# Altium PCB main.PcbDoc
Units mm, origin at the board's own origin, x right, y up, seen from the top; angles counter-clockwise.
Board outline 237.8 x 254 mm, 2 copper layers (Top Layer, Bottom Layer); 24 components, 126 nets, 68 pads, 12 vias.
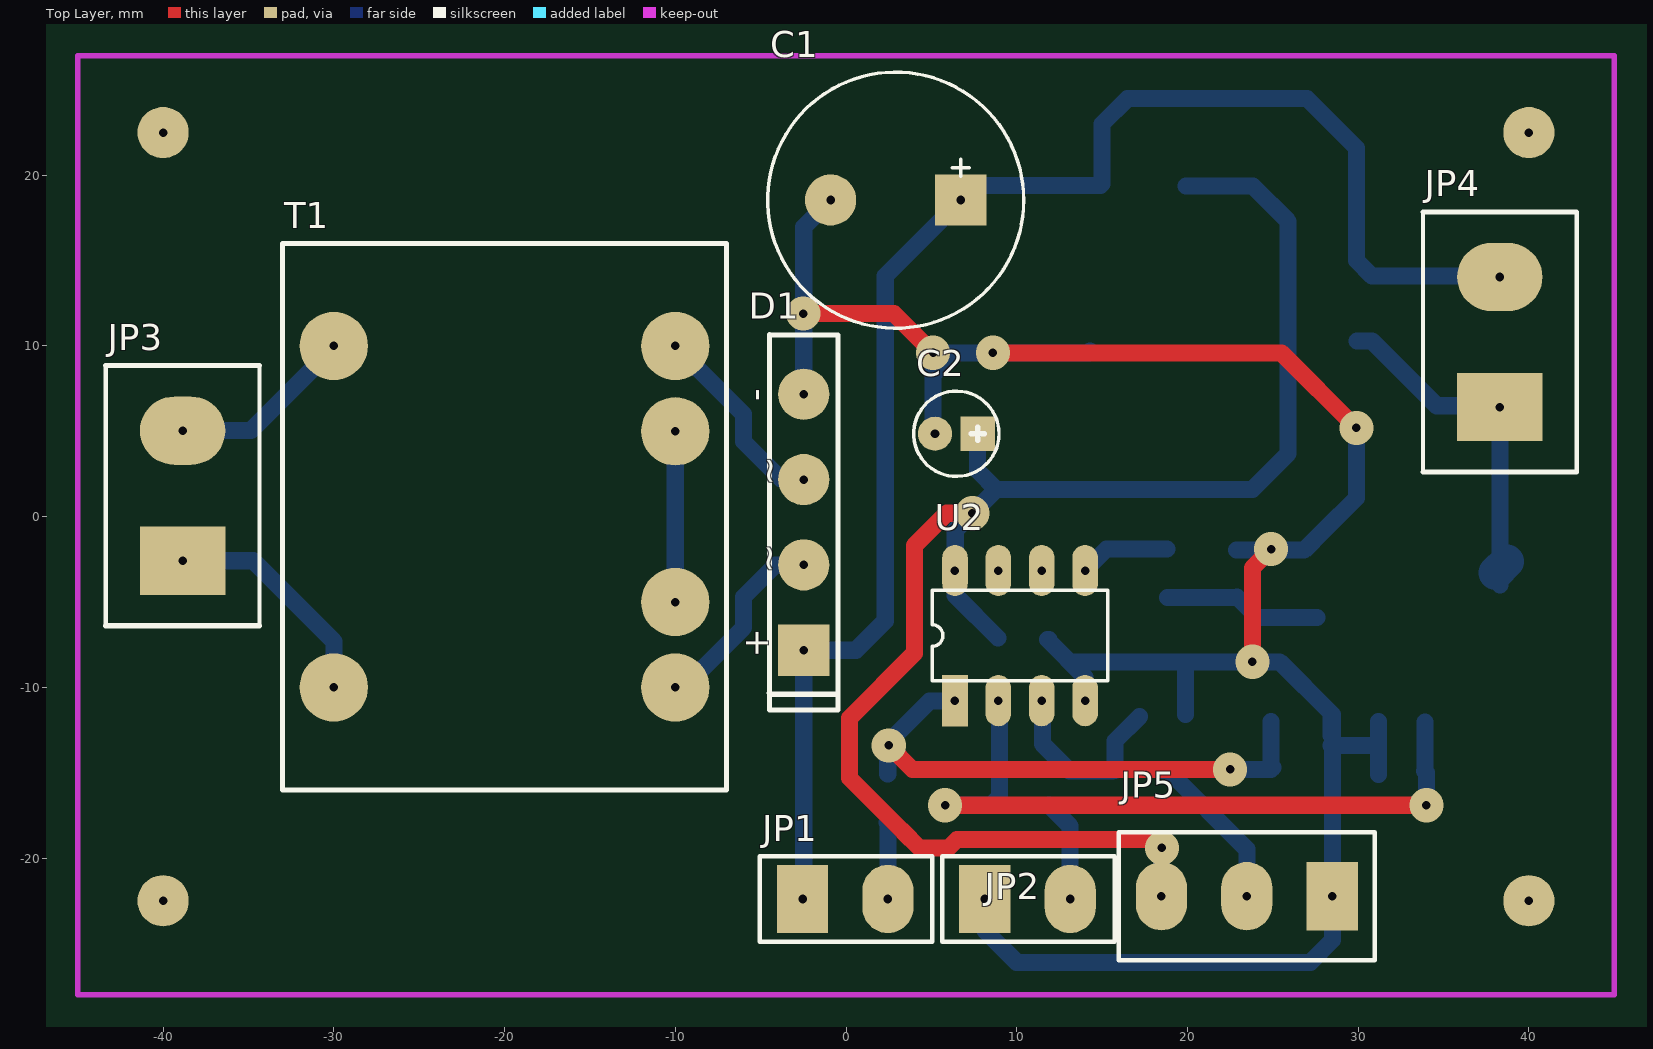
[diagram p0: Top Layer view]
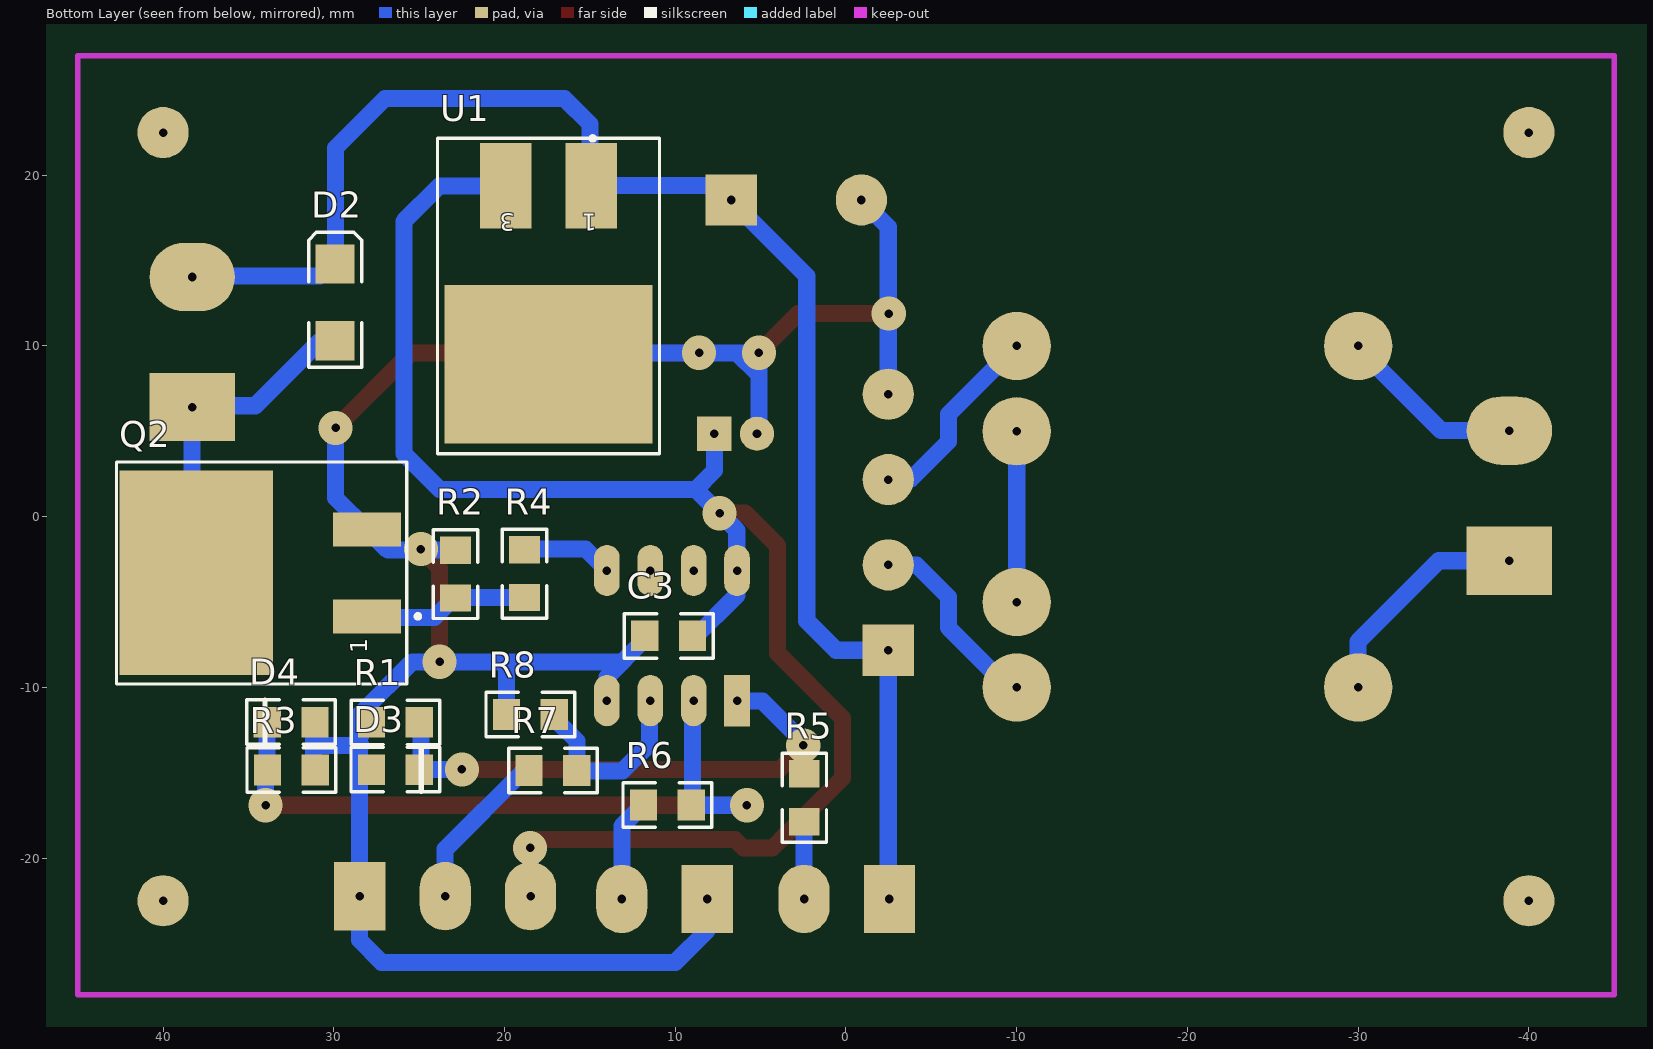
[diagram p1: Bottom Layer view, seen from below]

## Layer stack, top to bottom
Top Layer: signal copper 0.0356
Dielectric: dielectric 0.32, FR-4, Dk 4.8
Bottom Layer: signal copper 0.0356

## Board outline
-69.3,-61.2 167.4,-61.2 167.4,192.8 -70.4,192.8 -70.4,-61 -68,-61

## Design rules (kind name [scope] priority, off if disabled: settings)
Clearance KeepOut [OnLayer('Keep-Out Layer')] p1: gap=1
Clearance Clearance_3 [InPoly] p2: gap=1
Clearance [All] p3: gap=0.5
ComponentClearance [All] p1: gap=0.254 collisioncheckmode=0
HoleSize [All] p1: absolutevalues=TRUE maxlimit=5 minlimit=0.4 maxpercent=80.000 minpercent=20.000
PolygonConnect PolygonConnect_GND [InNet('GND')] p1: connectstyle=Direct reliefconductorwidth=0.4 reliefentries=4 polygonreliefangle="90 Angle"
PolygonConnect [All] p2: connectstyle=Direct reliefconductorwidth=0.254 reliefentries=4 polygonreliefangle="90 Angle"
RoutingLayers [All] p1: top layer=Horizontal bottom layer=Vertical
RoutingVias [All] p1: holewidth=0.8 width=1.4 viastyle="Through Hole" minholewidth=0.7 minwidth=1.3 maxholewidth=1 maxwidth=1.6
SolderMaskExpansion [All] p1: expansion=0.102
TestPointUsage [All] p1: valid=0 allowmultiple=FALSE
Testpoint [All] p1: side=15 testpointundercomponent=TRUE minsize=1.016 maxsize=2.54 preferedsize=1.524 minholesize=0 maxholesize=1.016 preferedholesize=0.813 testpointgrid=0.025 style=1023 order=1234567890
Width [All] p1: maxlimit=5 minlimit=0.1 preferedwidth=0.254 toplayer_prefwidth=1 bottomlayer_prefwidth=1 minimp=50.000000 maximp=50.000000 favimp=50.000000
15 further rules are at their usual default settings.

## Components (designator, comment, footprint, x,y, rotation, side; value= is the part's Value field where it differs from the comment)
C1 "" el8_L -0.9,18.55 r0 top
C2 "100x16" el3_L 7.725,4.85 r180 top
C3 "Cap Semi" _1206 10.375,-6.975 r180 bottom
D1 "Bridge2" KBU8M_L -2.475,-0.325 r90 top
D2 "10BQ100" DSO-C2/X2.3 29.925,12.55 r90 bottom
D3 "C5V6" _1206d 26.4,-14.825 r0 bottom (schematic designator D?)
D4 "C5V6" _1206d 32.5,-12.025 r180 bottom (schematic designator D?)
JP1 "BT5-2" BT5-2_L -2.55,-22.4 r0 top
JP2 "BT5-2" BT5-2_L 8.125,-22.4 r0 top (schematic designator JP?)
JP3 "BT8-2" BT8-2_L -38.85,-2.575 r90 top
JP4 "BT8-2" BT8-2_L 38.3,6.425 r90 top
JP5 "Header 3" BT5-3_L 28.475,-22.225 r180 top
Q2 "IRFR120" SIP-G3 33.05,-3.275 r90 bottom
R1 "20K" _1206 26.4,-12.05 r0 bottom (schematic designator R?)
R2 "20K" _1206 22.875,-3.35 r90 bottom
R3 "20K" _1206 32.475,-14.825 r180 bottom (schematic designator R?)
R4 "1K" _1206 18.825,-3.35 r270 bottom
R5 "1K" _1206 2.45,-16.45 r90 bottom (schematic designator R?)
R6 "1K" _1206 10.45,-16.875 r180 bottom (schematic designator R?)
R7 "1K0" _1206 17.175,-14.875 r0 bottom (schematic designator R?)
R8 "1K0" _1206 18.475,-11.575 r180 bottom
T1 "BV EI 422 1221" "BV EI 304 2840_L" -20,0 r270 top
U1 "MC7805ACD2T" D2PAKTO220_L 17.425,16.675 r0 bottom
U2 "ATTINY13" DIP-8 10.2,-6.975 r0 top

## Footprints (in the part's own frame and the unit in brackets; to place one, negate y for a bottom-side part, rotate by r counter-clockwise, add the part's x,y. Pads: shape width x height; smd on the part's side, far side on the other; paste and mask are expansions set on the pad)
_1206 [mm]
  rect 1.6x1.8 smd: 1(-1.412,-0.007) 2(1.388,-0.007)
  silkscreen extent -2.61,-1.31 2.59,1.29
_1206d [mm]
  rect 1.6x1.8 smd: 1(1.395,-0.009) 2(-1.405,-0.009)
  silkscreen extent -2.6,-1.31 2.6,1.29
BT5-2_L [mm]
  rect 3x4 hole 0.5: 1(0.006,0.008)
  oval 3x4 hole 0.5: 2(5.006,0.008)
  silkscreen extent -2.49,-2.49 7.61,2.51
BT5-3_L [mm]
  round 2 on Top Overlay: 0(-0.001,-4.001)
  rect 3x4 hole 0.5: 1(-0.001,-0.001)
  oval 3x4 hole 0.5: 2(4.999,-0.001) 3(9.999,-0.001)
  silkscreen extent -2.5,-3.75 12.5,3.75
BT8-2_L [mm]
  rect 4x5 hole 0.5: 1(-0.006,0.006)
  oval 4x5 hole 0.5: 2(7.614,0.006)
  silkscreen extent -3.82,-4.49 11.42,4.51
"BV EI 304 2840_L" [mm]
  round 4 hole 0.5: 1(-10,-10) 5(10,-10) 6(10,10) 7(5,10) 9(-5,10) 10(-10,10)
  silkscreen extent -16,-13 16,13
D2PAKTO220_L [mm]
  rect 3x5 smd: 1(-2.5,-2.7) 3(2.5,-2.7)
  rect 12.2x9.3 smd: 4(0,7.75)
  silkscreen extent -6.5,-5.6 6.5,13
DIP-8 [mm]
  rect 1.5x3 hole 0.5: 1(-3.817,-3.8)
  oval 1.5x3 hole 0.5: 2(-1.277,-3.8) 3(1.263,-3.8) 4(3.803,-3.8) 5(3.803,3.82) 6(1.263,3.82) 7(-1.277,3.82) 8(-3.817,3.82)
  silkscreen extent -5.16,-2.64 5.14,2.66
DSO-C2/X2.3 [mm]
  rect 2.3x2.3 smd: 1(-2.25,0) 2(2.25,0)
  silkscreen extent -3.8,-1.55 4.1,1.55
el3_L [mm]
  rect 2x2 hole 0.5: 1(0.011,-0.008)
  round 2 hole 0.5: 2(2.511,-0.008)
  silkscreen extent -1.24,-2.51 3.76,2.49
el8_L [mm]
  rect 3x3 hole 0.5: 1(7.62,0)
  round 3 hole 0.5: 2(0,0)
  silkscreen extent -3.69,-7.51 11.31,7.49
KBU8M_L [mm]
  rect 3x3 hole 0.5: 1(-7.5,0)
  round 3 hole 0.5: 2(-2.5,0) 3(7.5,0) 4(2.5,0)
  silkscreen extent -11,-2 11,2.02
SIP-G3 [mm]
  rect 2x4 smd: 1(-2.563,-4.996) 3(2.517,-4.996)
  rect 12x9 smd: 4(-0.011,5.004)
  silkscreen extent -6.52,-8.1 6.48,9.68

## Part data
C1: library part "Cap Pol1", "Polarized Capacitor (Radial)"
C2: library part "Cap Pol", "Polarized Capacitor (Radial)"
C3: "Capacitor (Semiconductor SIM Model)"
D1: "Diode Bridge"
D2: library part 10BQ015, "Schottky Rectifier"
D3 D4: library part Diode, "Default Diode"
JP1 JP2 JP5: "Header, 3-Pin"
JP3 JP4: library part BT5-2, "Header, 3-Pin"
Q2: "HEXFET N-Channel Power MOSFET"
R1 R2 R3 R4 R5 R6 R7 R8: library part Res2, "Resistor"
U1: "Three-Terminal Positive Voltage Regulator"

## Free pads (board coordinates)
  round 3 hole 0.5: 4(-40,22.5) 5(-40,-22.5) 6(40,-22.5) 7(40,22.5)

## Via types
v1: diameter 2, hole 0.5, Top Layer to Bottom Layer, 12 vias

## Nets (pads, with @x,y where several pads share a name; then routed paths per layer and width w, separated by ;. In a path a pad name is that pad's centre, name@x,y a point inside that pad or via, vN(x,y) a via of type N, cw(c..) or ccw(c..) an arc to the next point about the centre after c; other vN are vias at no path point)
+5V: C2.1 C3.2 JP5.3 U1.3 U2.8 | length 98
  Top Layer w1: 3.327,-18.427 4.3,-19.4 ; v1(7.4,0.2) 5.9,0.2 4,-1.7 4,-8 0.2,-11.8 0.2,-15.3 4.3,-19.4 ; v1(18.5,-19.4) 18,-18.9 6.5,-18.9 6,-19.4 4.3,-19.4
  Bottom Layer w1: C2.1@7.7,4.9 7.7,2.7 8.8,1.6 ; C3.2@8.9,-7.1 6.4,-4.6 6.4,-3.3 6.4,-3.2 6.4,-0.8 8.8,1.6 ; JP5.3 18.476,-19.424 v1(18.5,-19.4) ; U1.3 23.825,19.375 25.9,17.3 25.9,12.4 25.9,3.7 ; 25.1,2.9 25.098,2.898 25.9,3.7 ; 8.8,1.6 23.8,1.6 25.9,3.7
+12V: 
+18V: 
+24V: C1.1 D1.1 D2.2 JP1.1 JP4.2 U1.1 | length 92.1
  Bottom Layer w1: JP1.1@-2.6,-22.5 -2.475,-22.375 D1.1 0.575,-7.825 2.3,-6.1 ; 1.582,-6.818 2.3,-6.1 ; JP4.2@38.4,14.1 30.8,14.1 29.9,15 29.9,19.7 29.9,21.6 27,24.5 16.5,24.5 15,23 15,19.5 14.9,19.4 7.6,19.4 2.3,14.1 2.3,-6.1
+60V: 
+IAKB: 
-60V: 
-IAKB: 
AREF: 
AVCC: 
B6: 
B7: 
C1: 
C2: 
C3: 
C4: 
C5: 
C6: 
C7: 
D0: 
D1: 
D2: 
D3: 
D4: 
D5: 
GND: C1.2 C2.2 C3.1 D1.3 D3.1 D4.1 JP2.1 JP5.1 Q2.3 R1.2 R2.2 R3.2 R8.1 U1.4 U2.4 | length 152.2
  Top Layer w1: v1(-2.5,11.9) 2.8,11.9 v1(5.1,9.6) ; v1(8.6,9.6) 25.5,9.6 v1(29.9,5.2) ; v1(23.8,-8.5) 23.8,-3 v1(24.9,-1.9)
  Bottom Layer w1: D1.3 -2.475,16.975 C1.2 ; v1@5,9.5 5.1,9.5 5.2,9.6 v1(8.6,9.6) ; C2.2@5.1,4.9 5.1,8.3 6.4,9.6 v1(8.6,9.6) ; 5.1,7.1 v1(5.1,9.6) ; JP2.1 8.131,-24.231 10,-26.1 27.2,-26.1 28.5,-24.8 28.5,-22.2 28.5,-11.6 R1.2@28.4,-11.5 ; C3.1@11.9,-7.2 11.8,-7.2 14.003,-9.403 U2.4 ; 13.2,-8.5 25.4,-8.5 R1.2@28.4,-11.5 ; U1.4@14.3,9.7 14.2,9.6 v1(8.6,9.6) ; R8.1 19.887,-8.513 19.9,-8.5 ; R2.2 26.838,-1.962 28,-0.8 29.9,1.1 v1(29.9,5.2) ; v1@24.8,-1.9 v1(24.9,-1.9) ; 28.4,-13.4 31,-13.4 31.1,-13.5 31.2,-13.4 31.2,-12 R3.2@31.2,-15.1 ; R1.2@28.4,-12.8 R1.2@28.4,-11.5
I1: 
I2: 
I3: 
I4: 
I5: 
MISO: 
MOSI: 
NetC5_1: 
NetC5_2: 
NetC6_1: 
NetC8_2: 
NetC9_2: 
NetC10_1: 
NetC12_1: 
NetC16_1: 
NetC16_2: 
NetCR1_2: 
NetCR1_3: 
NetD1_1: 
NetD1_2: D1.2 T1.6 | length 11.6
  Bottom Layer w1: T1.6 -9.5,-10 -6,-6.5 -6,-4.7 -4.125,-2.825 D1.2
NetD1_3: 
NetD1_4: D1.4 T1.10 | length 11.6
  Bottom Layer w1: T1.10 -6,6 -6,4.4 -3.8,2.2 D1.4@-2.6,2.2
NetD2_1: 
NetD2_1: D2.1 JP4.1 Q2.4 | length 21.4
  Bottom Layer w1: D2.1 30.8,10.3 34.6,6.5 38.3,6.5 Q2.4@38.3,-4
  Bottom Layer w2: Q2.4 Q2.4@38.719,-2.621
NetD2_2: 
NetD3_1: 
NetD3_2: D3.2 R1.1 R5.2 U2.1 | length 32.9
  Top Layer w1: v1(2.5,-13.4) 3.9,-14.8 v1(22.5,-14.8)
  Bottom Layer w1: v1@2.4,-13.4 2.6,-13.4 v1(2.5,-13.4) ; R5.2 2.443,-13.257 4.9,-10.8 U2.1@6.4,-10.8 ; v1(22.5,-14.8) 24.9,-14.8 25,-14.7 24.9,-14.6 R1.1@24.9,-12
NetD4_1: 
NetD4_2: D4.2 R3.1 R6.2 U2.2 | length 42.3
  Top Layer w1: v1(5.8,-16.9) v1(34,-16.9)
  Bottom Layer w1: v1(5.8,-16.9) 8.5,-16.9 9,-16.4 U2.2@9,-10.6 ; D4.2 33.905,-14.895 33.9,-14.9 34,-15 v1(34,-16.9)
NetD5_1: 
NetD6_2: 
NetD7_1: 
NetD7_2: 
NetD8_2: 
NetD?_2: 
NetD?_2: 
NetDS1_1: 
NetDS2_1: 
NetFU1_1: 
NetFU1_2: 
NetJP1_1: 
NetJP1_1: 
NetJP1_2: JP1.2 R5.1 | length 4.5
  Bottom Layer w1: R5.1@2.4,-17.9 2.456,-17.956 JP1.2
NetJP2_2: JP2.2 R6.1 | length 6
  Bottom Layer w1: R6.1@11.9,-16.9 13.131,-18.131 JP2.2
NetJP3_1: JP3.1 T1.5 | length 13.7
  Bottom Layer w1: JP3.1 -34.719,-2.581 -30,-7.3 -30,-10.1 T1.5@-29.9,-10.1
NetJP3_2: JP3.2 T1.1 | length 10.9
  Bottom Layer w1: JP3.2 -34.861,5.039 T1.1@-30,9.9
NetJP4_1: 
NetJP5_2: JP5.2 R7.2 | length 9.6
  Bottom Layer w1: R7.2 18.868,-14.868 23.476,-19.476 JP5.2
NetJP6_1: 
NetJP7_1: 
NetJP8_1: 
NetJP9_1: 
NetJP10_1: 
NetJP11_1: 
NetJP12_1: 
NetJP?_2: 
NetL2_1: 
NetQ1_3: 
NetQ2_1: 
NetQ2_1: Q2.1 R2.1 R4.2 | length 9.3
  Bottom Layer w1: R4.2 22.862,-4.738 22.9,-4.7 24.1,-5.9 Q2.1@27.6,-5.9
NetQ3_1: 
NetQ4_1: 
NetQ5_1: 
NetQ6_1: 
NetQ7_1: 
NetQ8_1: 
NetQ9_1: 
NetQ10_1: 
NetR1_2: 
NetR3_2: 
NetR4_1: R4.1 U2.5 | length 5.3
  Bottom Layer w1: U2.5 15.258,-1.9 R4.1@18.8,-1.9
NetR4_2: 
NetR6_2: 
NetR7_1: R7.1 R8.2 U2.3 | length 11.3
  Bottom Layer w1: U2.3@11.5,-10.7 11.5,-10.6 11.5,-13.3 13.1,-14.9 R7.1@15.6,-14.9 ; R7.1 15.763,-13.137 R8.2@17.2,-11.7
NetR8_2: 
NetR8_3: 
NetR12_1: 
NetR13_1: 
NetR14_2: 
NetR15_2: 
NetR16_1: 
NetR18_1: 
NetR19_1: 
NetR22_1: 
NetR29_1: 
NetR?_1: 
NetT1_7: T1.7 T1.9 | length 10
  Bottom Layer w1: T1.7 T1.9
NetU1_2: 
NetU1_4: 
NetU1_12: 
NetU1_13: 
NetU2_1: 
NetU2_2: 
NetU2_2: 
NetU2_4: 
NetU3_2: 
NetU4_1: 
NetU4_15: 
RES: 
SCK: 
pads on no net: JP5.0 U2.6 U2.7

## Keep-outs
Keep-Out Layer:
  lines w0.3: -45,-28 45,-28 45,27 -45,27 -45,-28

## Silkscreen, mask and mechanical layers (free items; w line width, h text height)
Mechanical 1:
  lines w0.254: -37.355,-35.517 ccw(c-36.506,-36.436) -37.426,-37.284 ccw(c-36.506,-36.365) -35.587,-37.284 ; -37.284,35.587 cw(c-36.365,36.506) -37.284,37.426 cw(c-36.436,36.506) -35.517,37.355 ; -10.838,-9 cw(c-9.919,-9.919) -9,-9 cw(c-9.919,-9.849) -9.071,-10.768 ; -10.768,9.071 ccw(c-9.849,9.919) -9,9 ccw(c-9.919,9.919) -9,10.838 ; 9,-10.838 cw(c9.919,-9.919) 9,-9 cw(c9.849,-9.919) 10.768,-9.071 ; 9.071,10.768 ccw(c9.919,9.849) 9,9 ccw(c9.919,9.919) 10.838,9 ; 35.517,-37.355 ccw(c36.436,-36.506) 37.284,-37.426 ccw(c36.365,-36.506) 37.284,-35.587 ; 35.587,37.284 cw(c36.506,36.365) 37.426,37.284 cw(c36.506,36.436) 37.355,35.517
  lines w0.3: -37.355,-35.517 -10.838,-9 ; -37.284,35.587 -10.768,9.071 ; -35.587,-37.284 -9.071,-10.768 ; -35.517,37.355 -9,10.838 ; 9,-10.838 35.517,-37.355 ; 9.071,10.768 35.587,37.284 ; 10.768,-9.071 37.284,-35.587 ; 10.838,9 37.355,35.517

## Text inside footprints (layer, text, board x,y; h text height)
D1: Top Overlay "+" at -4.55,-8.275 h1.5 r90; Top Overlay "-" at -4.6,6.75 h1.5 r90; Top Overlay "~" at -3.825,1.8 h1.5 r90; Top Overlay "~" at -3.85,-3.3 h1.5 r90
Q2: Bottom Overlay "1" at 28.054,-7.986 h1 r270
U1: Bottom Overlay "1" at 14.592,17.753 h1 r180; Bottom Overlay "3" at 19.414,17.753 h1 r180